# EAGLE board bin_sum_calc (EAGLE 7.6.0)

Size 56.82 x 53.33 mm. Coordinates in mm from the lower left corner, seen from the top.
Outline: 0,0 56.82,0 56.82,53.33 0,53.33 0,0
Copper layers (1*16): Top 0.035mm / dielectric 1.5mm / Bottom 0.035mm
Design rules "default": minimum track width 10mil, minimum drill 24mil, track to track 8mil, track to pad 8mil, pad to pad 8mil, via to via 8mil, smd to smd 8mil, copper to edge 40mil, drill to drill 8mil, minimum pad ring 10mil, minimum via ring 8mil, stop-mask expansion 4mil, vias tented up to drill 0mil, thermal gap 10mil

## Footprints (pad centres in the part's own frame; a part is rotated, then mirrored left to right if it is on the bottom)
LED5MM = drill 0.813 octagon: A -1.27,0; K 1.27,0
0207/10 = drill 0.813 octagon: 1 -5.08,0; 2 5.08,0
M251 = drill 0.813 long: 1 -2.54,0; 2 0,0; 3 2.54,0
DIL14 = drill 0.813 long: 1 -7.62,-3.81; 2 -5.08,-3.81; 3 -2.54,-3.81; 4 0,-3.81; 5 2.54,-3.81; 6 5.08,-3.81; 7 7.62,-3.81; 8 7.62,3.81; 9 5.08,3.81; 10 2.54,3.81; 11 0,3.81; 12 -2.54,3.81; 13 -5.08,3.81; 14 -7.62,3.81

## Placement (x,y rotation side)
D1  [LED5MM]  5,22.78 0 top
D2  [LED5MM]  5,35.48 0 top
D3  [LED5MM]  5,111.68 0 top  (outside the outline)
D4  [LED5MM]  5,124.38 0 top  (outside the outline)
D5  [LED5MM]  5,175.18 0 top  (outside the outline)
D6  [LED5MM]  5,238.68 0 top  (outside the outline)
D7  [LED5MM]  5,251.38 0 top  (outside the outline)
D8  [LED5MM]  5,264.08 0 top  (outside the outline)
D9  [LED5MM]  5,327.58 0 top  (outside the outline)
D10  [LED5MM]  5,378.38 0 top  (outside the outline)
D11  [LED5MM]  5,391.08 0 top  (outside the outline)
D12  [LED5MM]  5,403.78 0 top  (outside the outline)
D13  [LED5MM]  5,467.28 0 top  (outside the outline)
R1  100‎Ω  [0207/10]  5,137.08 0 top  (outside the outline)
R2  100‎Ω  [0207/10]  5,149.78 0 top  (outside the outline)
R3  100‎Ω  [0207/10]  5,454.58 0 top  (outside the outline)
R3  100‎Ω  [0207/10]  5,454.58 0 top  (outside the outline)
R4  100‎Ω  [0207/10]  5,162.48 0 top  (outside the outline)
R5  100‎Ω  [0207/10]  5,187.88 0 top  (outside the outline)
R6  100‎Ω  [0207/10]  5,200.58 0 top  (outside the outline)
R7  100‎Ω  [0207/10]  5,213.28 0 top  (outside the outline)
R9  100‎Ω  [0207/10]  5,225.98 0 top  (outside the outline)
R10  100‎Ω  [0207/10]  5,314.88 0 top  (outside the outline)
R11  100‎Ω  [0207/10]  5,340.28 0 top  (outside the outline)
R12  100‎Ω  [0207/10]  5,352.98 0 top  (outside the outline)
R13  100‎Ω  [0207/10]  5,365.68 0 top  (outside the outline)
S1  [M251]  5,48.18 0 top
S2  [M251]  5,60.88 0 top  (outside the outline)
S3  [M251]  5,276.78 0 top  (outside the outline)
S4  [M251]  5,73.58 0 top  (outside the outline)
S5  [M251]  5,86.28 0 top  (outside the outline)
S6  [M251]  5,98.98 0 top  (outside the outline)
S7  [M251]  5,289.48 0 top  (outside the outline)
S8  [M251]  5,302.18 0 top  (outside the outline)
U1  [DIL14]  5,429.18 0 top  (outside the outline)
U2  [DIL14]  5,10.08 0 top
U3  [DIL14]  5,441.88 0 top  (outside the outline)

## Library data of the parts
D1-D13 R1-R3 R3-R7 R9-R13 S1-S8 U1-U3 = AUTODESK_CIRCUITS_BREADBOARD

## Nets
N$1: U2.6 U3.9
N$2: U2.3 U3.5
N$3: D2.A R1.1
N$4: D3.A R2.1
N$5: D1.A R4.1
N$6: D8.A R7.2
N$7: R10.1 S2.1 U1.2 U2.2
N$8: S2.3
N$9: S1.1
N$10: S6.1
N$11: D7.A R9.2
N$12: S5.1
N$13: D6.A R6.2
N$14: S4.1
N$15: D5.A R5.2
N$16: D9.A R10.2
N$17: D10.A R11.2
N$18: D11.A R12.2
N$19: D12.A R13.2
N$20: S8.3
N$21: S7.3
N$22: S3.3
N$23: R4.2 U2.11
N$24: D4.A R3.1
N$25: R5.1 S1.3 U1.1 U2.1
N$26: R3.2 U1.3
N$27: R11.1 S3.1 U1.5 U2.5
N$28: U1.6 U3.4
N$29: R12.1 S7.1 U1.10 U2.10
N$30: R13.1 S8.1 U1.13 U2.13
N$31: R7.1 S6.3 U1.12 U2.12
N$32: U2.8 U3.12
N$33: U3.1
N$34: U3.3
N$35: R2.2 U3.11
N$36: U3.2
N$37: R3.2 U3.6
N$38: R1.2 U3.8
N$39: S1.2 S2.2 S3.2 S4.2 S5.2 S6.2 S7.2 S8.2 U1.14 U2.14 U3.14
N$40: U1.11 U3.13
N$41: U1.8 U3.10
N$42: R9.1 S5.3 U1.9 U2.9
N$43: D13.A R3.1
N$44: D1.K D2.K D3.K D4.K D5.K D6.K D7.K D8.K D9.K D10.K D11.K D12.K D13.K U1.7 U2.7 U3.7
N$45: R6.1 S4.3 U1.4 U2.4

## Tracks (layer width: path | path; a pad name or v marks a point on that pad's centre or on a via)
N$1  (1 unrouted)
N$2  (1 unrouted)
N$3  (1 unrouted)
N$4  (1 unrouted)
N$5  (1 unrouted)
N$6  (1 unrouted)
N$7  (3 unrouted)
N$11  (1 unrouted)
N$13  (1 unrouted)
N$15  (1 unrouted)
N$16  (1 unrouted)
N$17  (1 unrouted)
N$18  (1 unrouted)
N$19  (1 unrouted)
N$23  (1 unrouted)
N$24  (1 unrouted)
N$25  (3 unrouted)
N$26  (1 unrouted)
N$27  (3 unrouted)
N$28  (1 unrouted)
N$29  (3 unrouted)
N$30  (3 unrouted)
N$31  (3 unrouted)
N$32  (1 unrouted)
N$35  (1 unrouted)
N$37  (1 unrouted)
N$38  (1 unrouted)
N$39  (10 unrouted)
N$40  (1 unrouted)
N$41  (1 unrouted)
N$42  (3 unrouted)
N$43  (1 unrouted)
N$44  (15 unrouted)
N$45  (3 unrouted)